# Altium PCB PCB.PcbDoc
Units mil, origin at the board's own origin, x right, y up, seen from the top; angles counter-clockwise.
Board outline 1000 x 1500 mil, 4 copper layers (Top Copper, Signal Layer GND, Signal Layer POWER, Bottom Copper), stack 61.811 mil thick; 54 components, 33 nets, 142 pads, 135 vias.
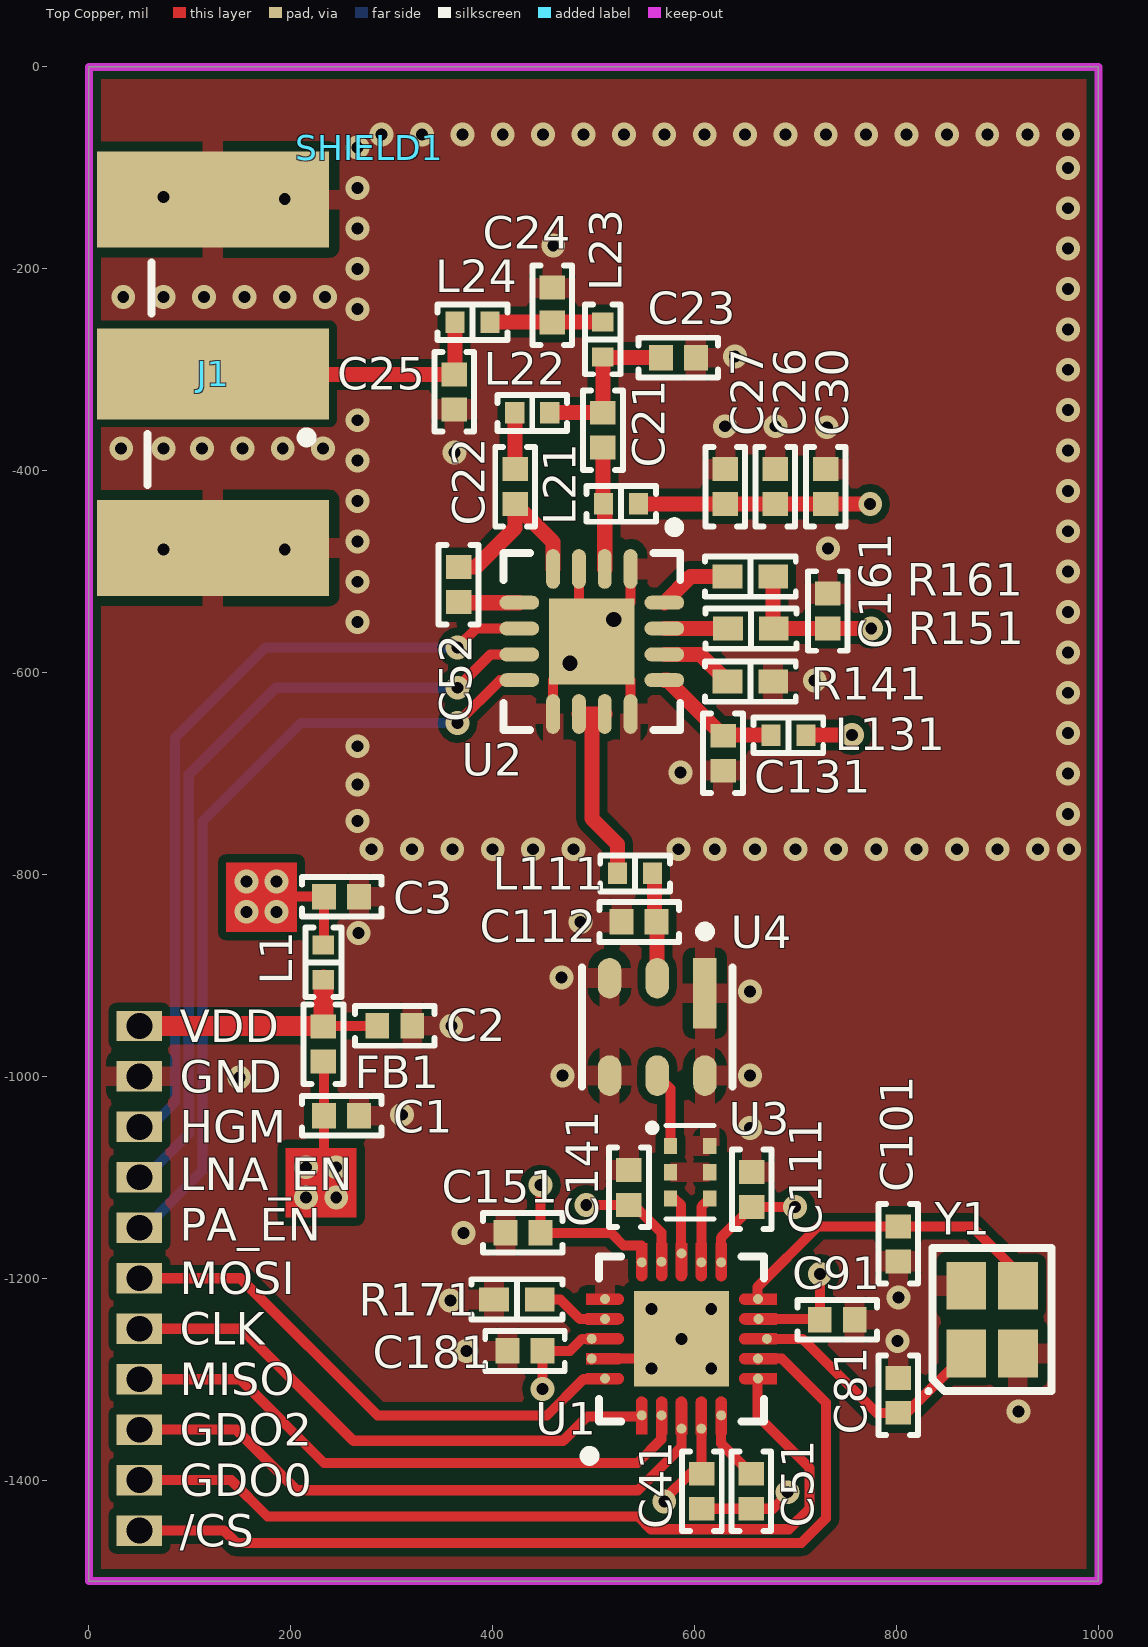
[diagram p0: Top Copper view]
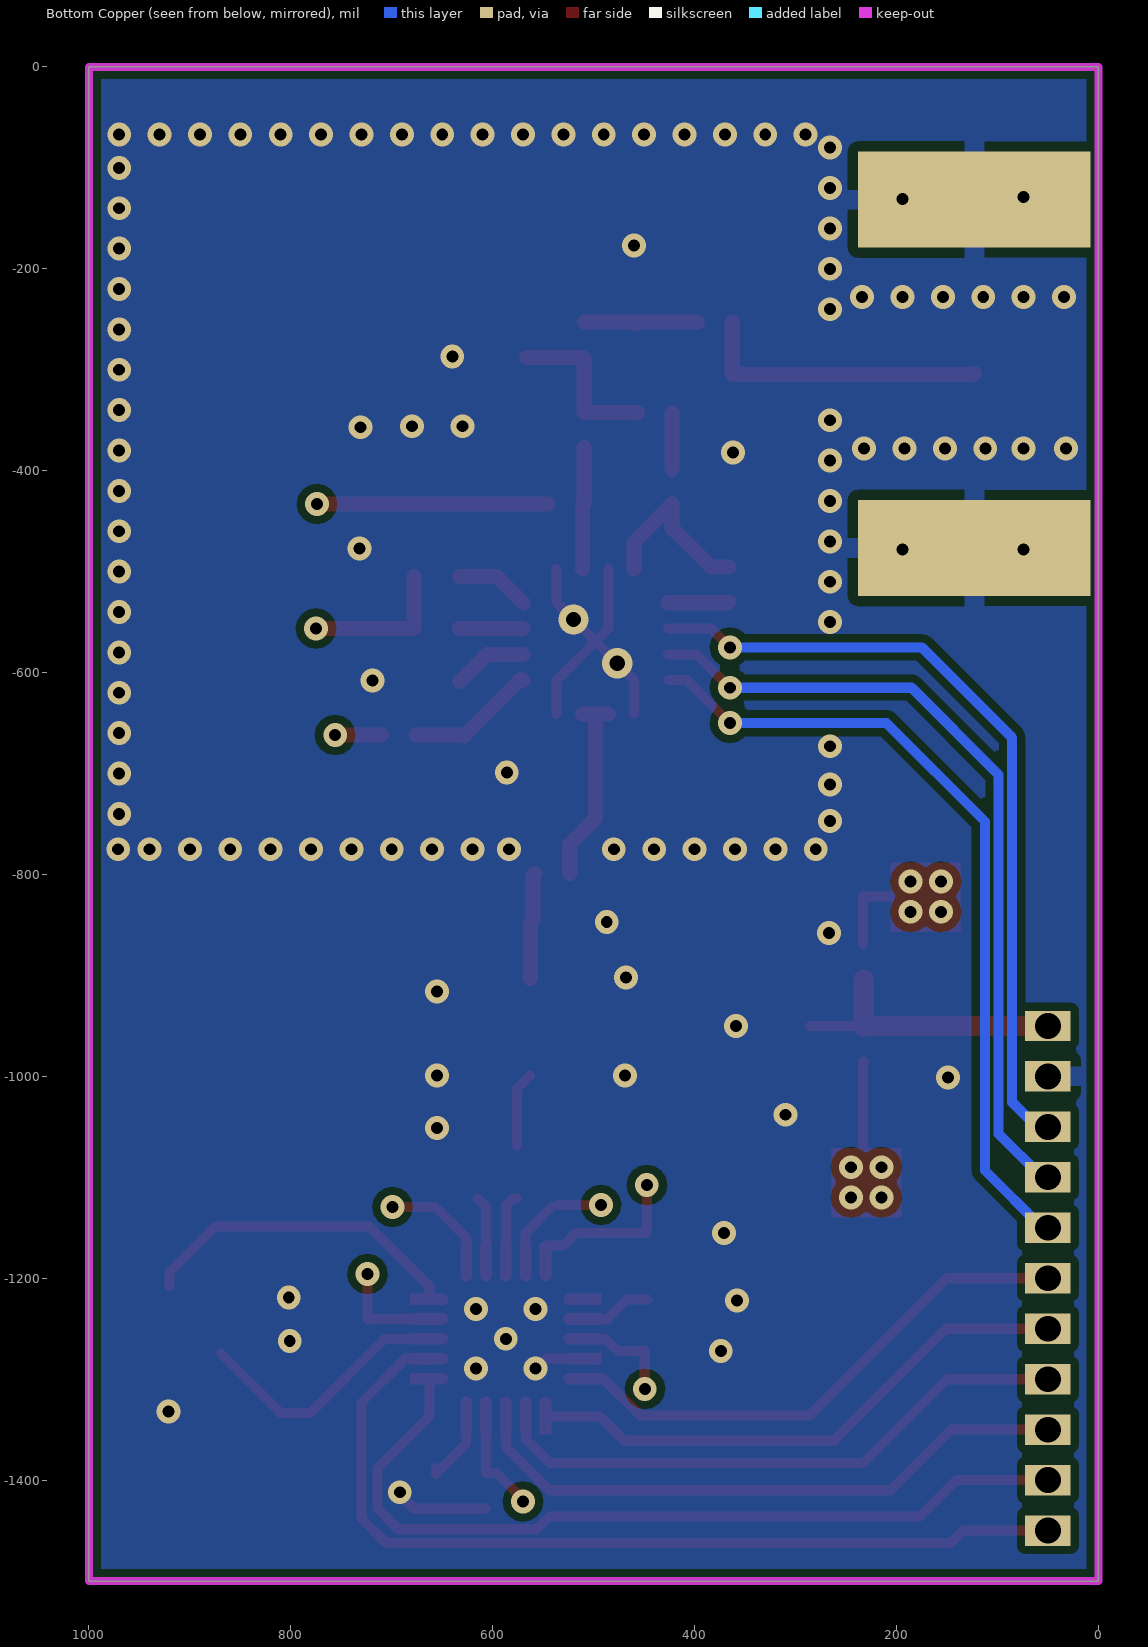
[diagram p1: Bottom Copper view, seen from below]
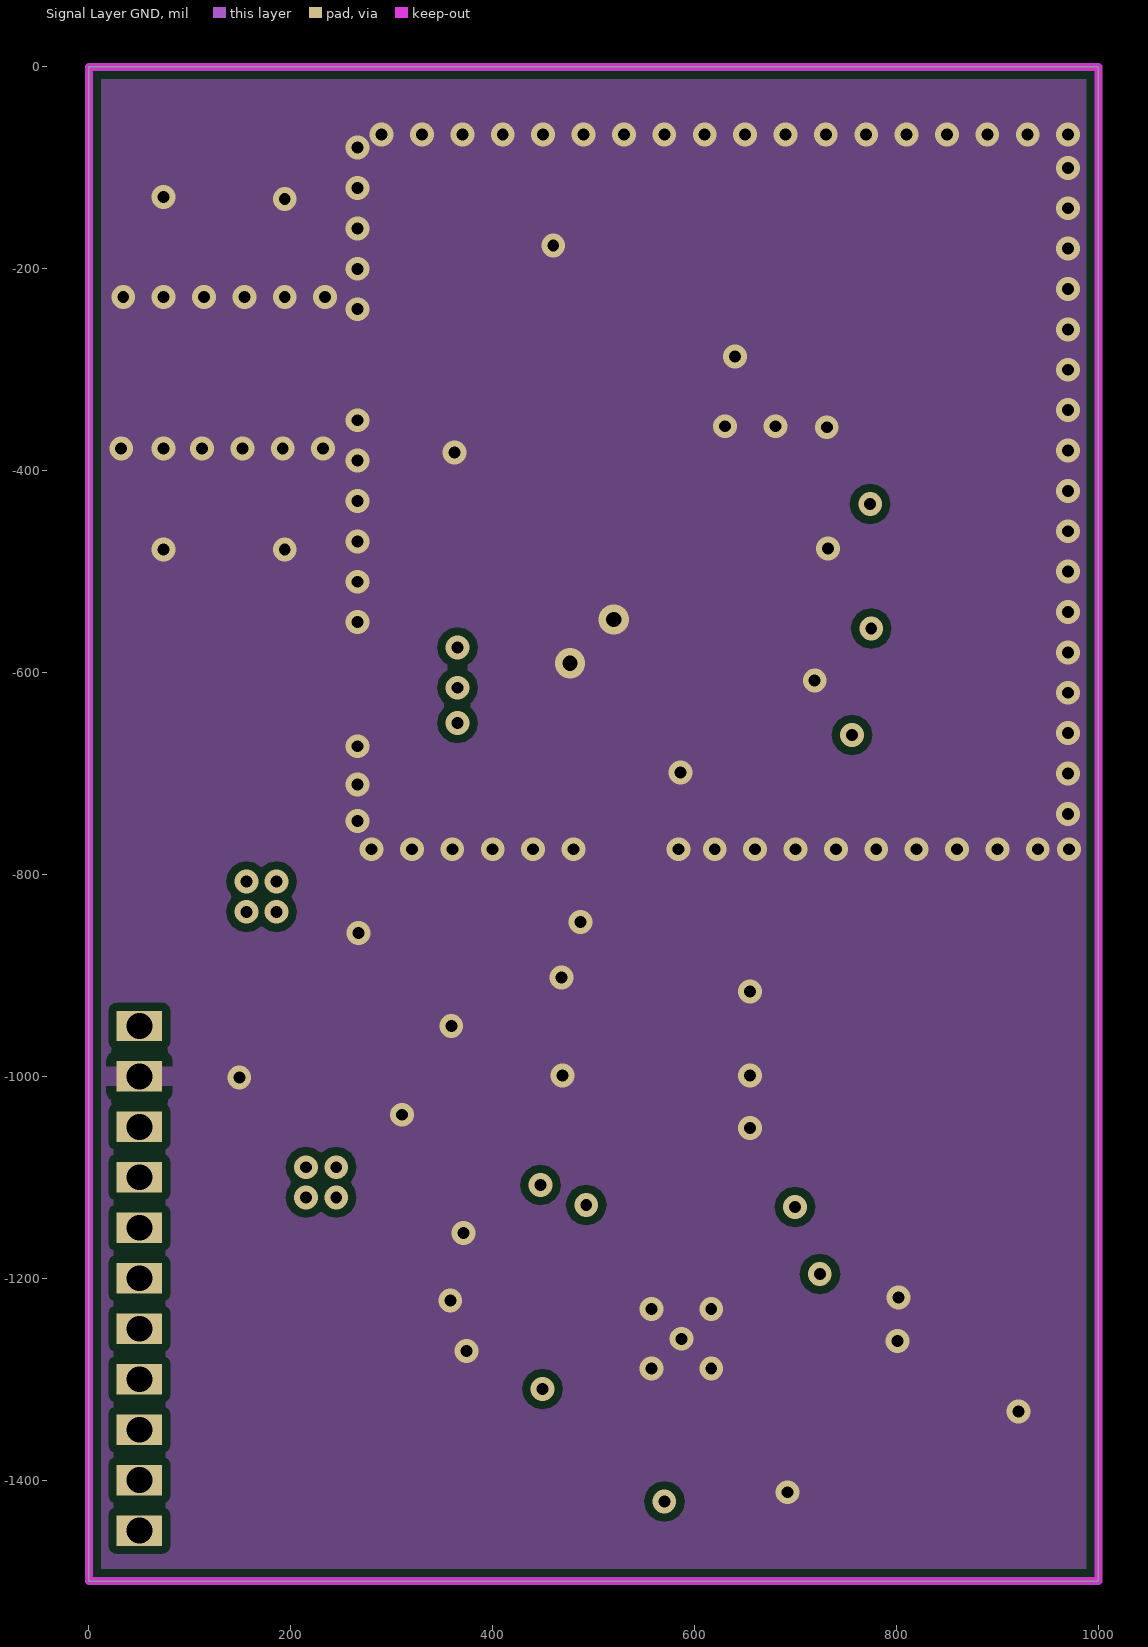
[diagram p2: Signal Layer GND]
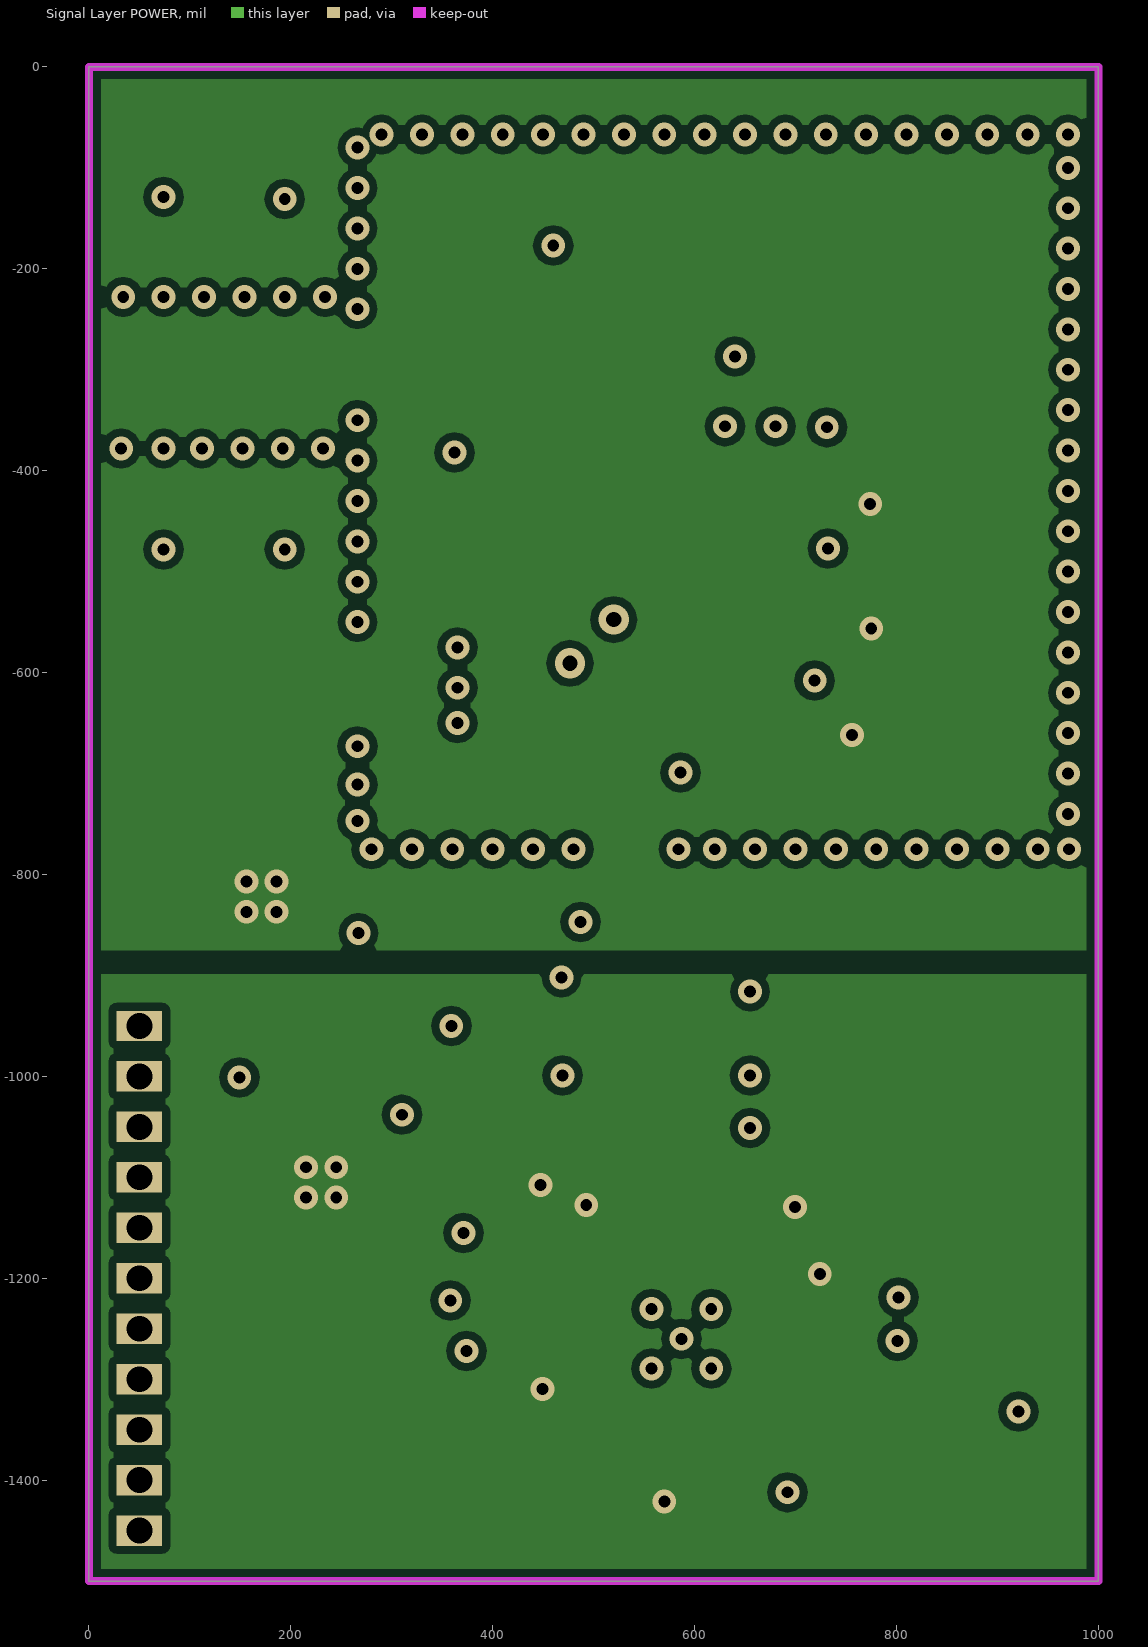
[diagram p3: Signal Layer POWER]

## Layer stack, top to bottom
Top Mask: solder mask 0.591, Solder Resist, Dk 3.8
Top Copper: signal copper 1.378
Dielectric 1: prepreg 7.874, 7628, Dk 4.6
Signal Layer GND: signal copper 0.689
Core: core 41.929, FR-4, Dk 4.5
Signal Layer POWER: signal copper 0.689
Dielectric 2: prepreg 7.874, 7628, Dk 4.6
Bottom Copper: signal copper 1.378
Bottom Mask: solder mask 0.591, Solder Resist, Dk 3.8

## Board outline
0,-1500 1000,-1500 1000,0 0,0

## Design rules (kind name [scope] priority, off if disabled: settings)
BoardOutlineClearance [All] p1: gap=7.87 ignorepadtopadclearanceinfootprint=FALSE except(15.75: Arc-SplitBarrior Arc-SplitContinuation Track-SplitBarrior Track-SplitContinuation SMDPad-SplitBarrior SMDPad-SplitContinuation THPad-SplitBarrior THPad-SplitContinuation Via-SplitBarrior Via-SplitContinuation Fill-SplitBarrior Fill-SplitContinuation Poly-SplitBarrior Poly-SplitContinuation Region-SplitBarrior Region-SplitContinuation Text-SplitBarrior Text-SplitContinuation)
Clearance "Clearance Bottom Layer" [OnLayer('Bottom Layer')] p1: gap=8 ignorepadtopadclearanceinfootprint=TRUE except(10: Arc-Text Track-Text SMDPad-Text THPad-Text Via-Text Fill-Text Poly-Text Region-Text Text-Text)
Clearance "Clearance Top Layer" [OnLayer('Top Layer')] p2: gap=8 ignorepadtopadclearanceinfootprint=TRUE except(10: Arc-Text Track-Text SMDPad-Text THPad-Text Via-Text Fill-Text Poly-Text Region-Text Text-Text)
Clearance [All] p3: gap=7.87 ignorepadtopadclearanceinfootprint=FALSE except(3.5: Arc-Arc Arc-Track Arc-SMDPad Track-Track Track-SMDPad SMDPad-SMDPad; 5: Arc-Via Track-Via SMDPad-Via THPad-Via Via-Via; 10: Arc-Text Track-Text SMDPad-Text THPad-Text Via-Text Fill-Text Poly-Text Region-Text Text-Text)
HoleSize [All] p1: absolutevalues=TRUE maxlimit=248.03 minlimit=7.87 maxpercent=80.000 minpercent=20.000
MinimumAnnularRing [All] p1: minimumring=3
MinimumSolderMaskSliver [All] p1: minsoldermaskwidth=3.94
PolygonConnect PolygonConnect_1 [All] p1: thpad.connectstyle=Relief thpad.reliefconductorwidth=20 thpad.reliefentries=4 thpad.polygonreliefangle="90 Angle" thpad.airgapwidth=10 smdpad.connectstyle=Relief smdpad.reliefconductorwidth=20 smdpad.reliefentries=4 smdpad.polygonreliefangle="90 Angle" smdpad.airgapwidth=10 via.connectstyle=Direct via.reliefconductorwidth=20 via.reliefentries=4 via.polygonreliefangle="90 Angle" via.airgapwidth=10
RoutingCorners [All] p1: cornerstyle=Round minsetback=100 maxsetback=100
RoutingVias [All] p1: holewidth=19.68 width=39.37 viastyle="Through Hole" minholewidth=7.87 minwidth=17.72 maxholewidth=39.37 maxwidth=78.74
SilkToSilkClearance [All] p1: silktosilkclearance=3.94
SilkToSolderMaskClearance [IsPad] p1: minsilkscreentomaskgap=3.94 clearancetoexposedcopper=TRUE
SolderMaskExpansion [All] p1: expansion=4
Width [All] p1: maxlimit=100 minlimit=3.5 preferedwidth=15
25 further rules are at their usual default settings.

## Classes and differential pairs
component class POWER_SUPPLY: C1 C2 C3 C26 C27 C30 C131 C161 FB1 L1 L21 L131
component class "RF MODULE": /CS C21 C22 C23 C24 C25 C41 C51 C52 C81 C91 C101 C111 C112 C141 C151 C181 CLK GDO0 GDO2 GND HGM J1 L22 L23 L24 L111 LNA_EN MISO MOSI PA_EN R141 R151 R161 R171 SHIELD1 U1 U2 U3 U4 VDD Y1

## Components (designator, comment, footprint, x,y, rotation, side; value= is the part's Value field where it differs from the comment)
/CS "Castellation" CASTELLATION 50,-1450 r270 top
C1 "1uF" "CAP 0402/1005" 250.32,-1039 r180 top
C2 "220pF" "CAP 0402/1005" 303,-950 r180 top
C3 "10uF" "CAP 0402/1005" 250.32,-822 r180 top
C21 "47pF" "CAP 0402/1005" 509.24,-359.85 r270 top
C22 "12pF" "CAP 0402/1005" 422.24,-415.79 r90 top
C23 "3.3pF" "CAP 0402/1005" 584,-288 r180 top
C24 "7.5pF" "CAP 0402/1005" 459,-236 r270 top
C25 "0.50pF" "CAP 0402/1005" 362,-322 r90 top
C26 "47pF" "CAP 0402/1005" 680,-415.72 r270 top
C27 "1000pF" "CAP 0402/1005" 630.43,-415.72 r270 top
C30 "1uF" "CAP 0402/1005" 730,-415.72 r270 top
C41 "0.10uF" "CAP 0402/1005" 607.24,-1411 r90 top
C51 "0.10uF" "CAP 0402/1005" 656.24,-1411 r90 top
C52 "12pF" "CAP 0402/1005" 366.2,-512.88 r90 top
C81 "12pF" "CAP 0402/1005" 801.69,-1315.97 r270 top
C91 "0.10uF" "CAP 0402/1005" 741.39,-1241 r180 top
C101 "15pF" "CAP 0402/1005" 801.69,-1166.03 r90 top
C111 "0.10uF" "CAP 0402/1005" 656.69,-1112 r270 top
C112 "0.80pF" "CAP 0402/1005" 545,-847 r0 top
C131 "15pF" "CAP 0402/1005" 628.2,-679.88 r90 top
C141 "0.10uF" "CAP 0402/1005" 535,-1110 r270 top
C151 "0.10uF" "CAP 0402/1005" 430,-1155 r0 top
C161 "27pF" "CAP 0402/1005" 732,-539 r270 top
C181 "0.10uF" "CAP 0402/1005" 432,-1272 r0 top
CLK "Castellation" CASTELLATION 50,-1250 r270 top
FB1 "1 kOhm @ 100MHz" "FER 0402/1005" 232.32,-968 r270 top
GDO0 "Castellation" CASTELLATION 50,-1400 r270 top
GDO2 "Castellation" CASTELLATION 50,-1350 r270 top
GND "Castellation" CASTELLATION 50,-1000 r270 top
HGM "Castellation" CASTELLATION 50,-1050 r270 top
J1 "73251-1150" Molex_73251-1150_0 -159.28,-304 r0 top
L1 "11nH" "IND 0402/1005 RF WW" 232.32,-887 r90 top
L21 "22nH" "IND 0402/1005 RF WW" 527.24,-432.85 r0 top
L22 "7.5nH" "IND 0402/1005 RF WW" 439.19,-342.78 r0 top
L23 "2.9nH" "IND 0402/1005 RF WW" 509,-270 r270 top
L24 "9.1nH" "IND 0402/1005 RF WW" 380,-253 r0 top
L111 "10nH" "IND 0402/1005 RF WW" 541,-799 r180 top
L131 "1.5nH" "IND 0402/1005 RF WW" 693,-662 r180 top
LNA_EN "Castellation" CASTELLATION 50,-1100 r270 top
MISO "Castellation" CASTELLATION 50,-1300 r270 top
MOSI "Castellation" CASTELLATION 50,-1200 r270 top
PA_EN "Castellation" CASTELLATION 50,-1150 r270 top
R141 "3.3k" "RES 0402/1005" 655.2,-608.88 r180 top
R151 "47" "RES 0402/1005" 655.74,-556.4 r180 top
R161 "10" "RES 0402/1005" 655.2,-504.88 r180 top
R171 "56k" "RES 0402/1005" 424,-1221 r0 top
SHIELD1 "SMS-202F" SMS-202F 278,-80 r0 top
U1 "CC1101RGPR" Texas_Instruments_RGP0020C_0 587,-1260 r0 top
U2 "CC1190RGVT" QFN65P400X400X100_HS-17N 498.2,-569.15 r270 top
U3 "0896BM15A0001" 0896BM15A0001 595,-1095 r0 top
U4 "Filter_TDK_B39871B3725U410_eec" TDK_B39871B3725U410_0 563,-951 r270 top
VDD "Castellation" CASTELLATION 50,-950 r270 top
Y1 "26MHz" "NDK NX2520SA" 894.69,-1241 r90 top

## Footprints (in the part's own frame and the unit in brackets; to place one, negate y for a bottom-side part, rotate by r counter-clockwise, add the part's x,y. Pads: shape width x height; smd on the part's side, far side on the other; paste and mask are expansions set on the pad)
0896BM15A0001 [mm]
  rect 0.33x0.41 smd: 1(-0.483,0.66) 2(-0.483,0) 3(-0.483,-0.66) 4(0.507,-0.66) 5(0.507,0) 6(0.507,0.66)
  silkscreen extent -0.97,-1.17 0.61,1.18, body extent -0.61,-1.25 0.64,1.25, height 0.8
"CAP 0402/1005" [mm] "Chip Capacitor, 2-Leads, Body 1.02x0.51mm, IPC Medium Density"
  rect 0.6x0.64 smd: 1(-0.44,0) 2(0.44,0)
  silkscreen extent -1,-0.5 1,0.5, body extent -0.5,-0.26 0.5,0.26, height 0.52
CASTELLATION [mil]
  rect 30x45 hole 25.59: PIN(0,0)
"FER 0402/1005" [mm] "Chip Ferrite, 2-Leads, Body 1.02x0.51mm, IPC Medium Density"
  rect 0.6x0.64 smd: 1(-0.44,0) 2(0.44,0)
  silkscreen extent -1,-0.5 1,0.5, body extent -0.5,-0.26 0.5,0.26, height 0.52
"IND 0402/1005 RF WW" [mm] "Chip Inductor, 2-Leads, Body 1.00x0.50mm, IPC High Density"
  rect 0.48x0.54 smd: 1(-0.44,0) 2(0.44,0)
  silkscreen extent -0.87,-0.45 0.87,0.45, body extent -0.5,-0.29 0.5,0.29, height 0.51
Molex_73251-1150_0 [mm]
  rect 5.84x2.29 smd paste+0 mask+0: 1(7.17,0)
  rect 5.84x2.415 smd paste+0 mask+0: 2(7.17,4.383) 3(7.17,-4.383)
  rect 5.84x2.415 smd far side paste+0 mask+0: 4(7.17,4.383) 5(7.17,-4.383)
  silkscreen extent 5.53,-2.8 9.65,2.8, body extent -4.5,-4.76 9.77,4.76, height 4.51
"NDK NX2520SA" [mm] "Crystal, 4-Leads, Body 2.00x2.50mm, Pitch 1.70mm, IPC Medium Density"
  rect 1.2x1 smd: 1(-0.85,0.65) 2(-0.85,-0.65) 3(0.85,-0.65) 4(0.85,0.65)
  silkscreen extent -1.85,-1.5 1.8,1.65, body extent -1.26,-1.01 1.26,1.01, height 0.5
QFN65P400X400X100_HS-17N [mm] "QFN, 16-Leads, Body 4.00x4.00mm, Pitch 0.65mm, Thermal Pad 2.16x2.16mm, IPC Medium Density"
  oval 1x0.35 smd: 1(-1.825,0.975) 2(-1.825,0.325) 3(-1.825,-0.325) 4(-1.825,-0.975) 9(1.825,-0.975) 10(1.825,-0.325) 11(1.825,0.325) 12(1.825,0.975)
  oval 0.35x1 smd: 5(-0.975,-1.825) 6(-0.325,-1.825) 7(0.325,-1.825) 8(0.975,-1.825) 13(0.975,1.825) 14(0.325,1.825) 15(-0.325,1.825) 16(-0.975,1.825)
  rect 2.16x2.16 smd: 17(0,0)
  silkscreen extent -3,-2.22 2.22,2.22, body extent -2.07,-2.07 2.07,2.07, height 1
"RES 0402/1005" [mm] "Chip Resistor, 2-Leads, Body 1.0x0.5mm, IPC Medium Density"
  rect 0.75x0.6 smd: 1(-0.575,0) 2(0.575,0)
  silkscreen extent -1.14,-0.51 1.14,0.51, body extent -0.5,-0.25 0.5,0.25, height 0.35
SMS-202F [mil] "RF SHIELD 0.65\" X 0.65\" SMD"
  body extent 22,-665 661,-26, height 142
TDK_B39871B3725U410_0 [mm]
  rect 1.771x0.591 smd paste+0 mask+0: 1(-0.85,1.2)
  oval 1.021x0.591 smd paste+0 mask+0: 2(-1.225,0) 3(-1.225,-1.2) 4(1.225,-1.2) 5(1.225,0) 6(1.225,1.2)
  silkscreen extent -2.52,-1.9 1.5,1.9, body extent -1.52,-1.5 1.52,1.5, height 1.26
Texas_Instruments_RGP0020C_0 [mm]
  round 0.252 smd paste-1000 mask+0: 1(-1,-1.925) 2(-0.5,-1.925) 3(0,-2.26) 4(0.5,-2.26) 5(1,-1.925) 6(1.925,-1) 7(1.925,-0.5) 8(2.15,0) 9(1.94,0.5) 10(1.925,1) 11(1,1.925) 12(0.5,1.925) 13(0,2.15) 14(-0.5,1.94) 15(-1,1.925) 16(-1.925,1) 17(-1.925,0.5) 18(-2.26,0) 19(-2.26,-0.5) 20(-1.925,-1)
  rect 2.4x2.4 smd paste-1000 mask+0: 21(0,0)
  Top Copper region: -2.4,-0.86 -1.59,-0.86 -1.536,-0.871 -1.491,-0.901 -1.461,-0.946 -1.45,-1 -1.45,-1 -1.461,-1.054 -1.491,-1.099 -1.536,-1.129 -1.59,-1.14 -1.59,-1.14 -2.4,-1.14
  Top Copper region: -2.4,-0.36 -1.59,-0.36 -1.536,-0.371 -1.491,-0.401 -1.461,-0.446 -1.45,-0.5 -1.45,-0.5 -1.461,-0.554 -1.491,-0.599 -1.536,-0.629 -1.59,-0.64 -1.59,-0.64 -2.4,-0.64
  Top Copper region: -2.4,0.14 -1.59,0.14 -1.536,0.129 -1.491,0.099 -1.461,0.054 -1.45,0 -1.45,0 -1.461,-0.054 -1.491,-0.099 -1.536,-0.129 -1.59,-0.14 -1.59,-0.14 -2.4,-0.14
  Top Copper region: -2.4,0.64 -1.59,0.64 -1.536,0.629 -1.491,0.599 -1.461,0.554 -1.45,0.5 -1.45,0.5 -1.461,0.446 -1.491,0.401 -1.536,0.371 -1.59,0.36 -1.59,0.36 -2.4,0.36
  Top Copper region: -2.4,1.14 -1.59,1.14 -1.536,1.129 -1.491,1.099 -1.461,1.054 -1.45,1 -1.45,1 -1.461,0.946 -1.491,0.901 -1.536,0.871 -1.59,0.86 -1.59,0.86 -2.4,0.86
  Top Copper region: 2.4,0.86 1.59,0.86 1.536,0.871 1.491,0.901 1.461,0.946 1.45,1 1.45,1 1.461,1.054 1.491,1.099 1.536,1.129 1.59,1.14 1.59,1.14 2.4,1.14
  Top Copper region: 2.4,0.36 1.59,0.36 1.536,0.371 1.491,0.401 1.461,0.446 1.45,0.5 1.45,0.5 1.461,0.554 1.491,0.599 1.536,0.629 1.59,0.64 1.59,0.64 2.4,0.64
  Top Copper region: 2.4,-0.14 1.59,-0.14 1.536,-0.129 1.491,-0.099 1.461,-0.054 1.45,0 1.45,0 1.461,0.054 1.491,0.099 1.536,0.129 1.59,0.14 1.59,0.14 2.4,0.14
  Top Copper region: 2.4,-0.64 1.59,-0.64 1.536,-0.629 1.491,-0.599 1.461,-0.554 1.45,-0.5 1.45,-0.5 1.461,-0.446 1.491,-0.401 1.536,-0.371 1.59,-0.36 1.59,-0.36 2.4,-0.36
  Top Copper region: 2.4,-1.14 1.59,-1.14 1.536,-1.129 1.491,-1.099 1.461,-1.054 1.45,-1 1.45,-1 1.461,-0.946 1.491,-0.901 1.536,-0.871 1.59,-0.86 1.59,-0.86 2.4,-0.86
  Top Copper region: -0.86,2.4 -0.86,1.59 -0.871,1.536 -0.901,1.491 -0.946,1.461 -1,1.45 -1,1.45 -1.054,1.461 -1.099,1.491 -1.129,1.536 -1.14,1.59 -1.14,1.59 -1.14,2.4
  Top Copper region: -0.36,2.4 -0.36,1.59 -0.371,1.536 -0.401,1.491 -0.446,1.461 -0.5,1.45 -0.5,1.45 -0.554,1.461 -0.599,1.491 -0.629,1.536 -0.64,1.59 -0.64,1.59 -0.64,2.4
  Top Copper region: 0.14,2.4 0.14,1.59 0.129,1.536 0.099,1.491 0.054,1.461 0,1.45 0,1.45 -0.054,1.461 -0.099,1.491 -0.129,1.536 -0.14,1.59 -0.14,1.59 -0.14,2.4
  Top Copper region: 0.64,2.4 0.64,1.59 0.629,1.536 0.599,1.491 0.554,1.461 0.5,1.45 0.5,1.45 0.446,1.461 0.401,1.491 0.371,1.536 0.36,1.59 0.36,1.59 0.36,2.4
  Top Copper region: 1.14,2.4 1.14,1.59 1.129,1.536 1.099,1.491 1.054,1.461 1,1.45 1,1.45 0.946,1.461 0.901,1.491 0.871,1.536 0.86,1.59 0.86,1.59 0.86,2.4
  Top Copper region: 0.86,-2.4 0.86,-1.59 0.871,-1.536 0.901,-1.491 0.946,-1.461 1,-1.45 1,-1.45 1.054,-1.461 1.099,-1.491 1.129,-1.536 1.14,-1.59 1.14,-1.59 1.14,-2.4
  Top Copper region: 0.36,-2.4 0.36,-1.59 0.371,-1.536 0.401,-1.491 0.446,-1.461 0.5,-1.45 0.5,-1.45 0.554,-1.461 0.599,-1.491 0.629,-1.536 0.64,-1.59 0.64,-1.59 0.64,-2.4
  Top Copper region: -0.14,-2.4 -0.14,-1.59 -0.129,-1.536 -0.099,-1.491 -0.054,-1.461 0,-1.45 0,-1.45 0.054,-1.461 0.099,-1.491 0.129,-1.536 0.14,-1.59 0.14,-1.59 0.14,-2.4
  Top Copper region: -0.64,-2.4 -0.64,-1.59 -0.629,-1.536 -0.599,-1.491 -0.554,-1.461 -0.5,-1.45 -0.5,-1.45 -0.446,-1.461 -0.401,-1.491 -0.371,-1.536 -0.36,-1.59 -0.36,-1.59 -0.36,-2.4
  Top Copper region: -1.14,-2.4 -1.14,-1.59 -1.129,-1.536 -1.099,-1.491 -1.054,-1.461 -1,-1.45 -1,-1.45 -0.946,-1.461 -0.901,-1.491 -0.871,-1.536 -0.86,-1.59 -0.86,-1.59 -0.86,-2.4
  silkscreen extent -2.44,-3.07 2.07,2.07, body extent -2.5,-2.5 2.5,2.5, height 0.8

## Part data
C1 C30: library part GRM155R60J105KE19D, "CAP CER 1UF 6.3V X5R 0402", Device Package="0402 (1005 Metric)", Manufacturer="Murata Electronics North America", Supplier Part Number 1=490-1320-2-ND, TemperatureCoefficient=X5R, TemperatureRange="-55C ~ 85C", Tolerance=10%, Voltage=6.3V, ComponentLink1Description=Datasheet, ComponentLink1URL=http://www.murata.com/~/media/webrenewal/support/library/catalog/products/capacitor/mlcc/c02e.pdf, ComponentLink2Description="Digi-Key Listing", ComponentLink2URL=https://www.digikey.com/product-detail/en/murata-electronics-north-america/GRM155R60J105KE19D/490-1320-2-ND/587208, PartId=12330, Part Number=GRM155R60J105KE19D, Price=0,006, Supplier 1=Digi-Key
C2: library part GCM1555C1H221JA16D, "CAP CER 220PF 50V NP0 0402", Device Package="0402 (1005 Metric)", Manufacturer="Murata Electronics North America", Supplier Part Number 1=490-4927-2-ND, TemperatureCoefficient="C0G, NP0", TemperatureRange="-55C ~ 125C", Tolerance=5%, Voltage=50V, ComponentLink1Description=Datasheet, ComponentLink1URL=http://www.murata.com/~/media/webrenewal/support/library/catalog/products/capacitor/mlcc/c03e.ashx, ComponentLink2Description="Digi-Key Listing", ComponentLink2URL=https://www.digikey.com/product-detail/en/murata-electronics-north-america/GCM1555C1H221JA16D/490-4927-2-ND/1765175, PartId=12828, Part Number=GCM1555C1H221JA16D, Price=0,0109, Supplier 1=Digi-Key
C3: library part C1005X5R0J106M050BC, "CAP CER 10UF 6.3V X5R 0402", Device Package="0402 (1005 Metric)", Manufacturer="TDK Corporation", Supplier Part Number 1=445-8920-2-ND, TemperatureCoefficient=X5R, TemperatureRange="-55C ~ 85C", Tolerance=20%, Voltage=6.3V, ComponentLink1Description=Datasheet, ComponentLink1URL=https://product.tdk.com/info/en/catalog/datasheets/mlcc_commercial_general_en.pdf, ComponentLink2Description="Digi-Key Listing", ComponentLink2URL=https://www.digikey.com/product-detail/en/tdk-corporation/C1005X5R0J106M050BC/445-8920-2-ND/3507809, PartId=12380, Part Number=C1005X5R0J106M050BC, Price=0,119, Supplier 1=Digi-Key
C21 C26: library part GRM1555C1H470JA01D, "CAP CER 47PF 50V NP0 0402", Device Package="0402 (1005 Metric)", Manufacturer="Murata Electronics North America", Supplier Part Number 1=490-5942-2-ND, TemperatureCoefficient="C0G, NP0", TemperatureRange="-55C ~ 125C", Tolerance=5%, Voltage=50V, ComponentLink1Description=Datasheet, ComponentLink1URL=http://www.murata.com/~/media/webrenewal/support/library/catalog/products/capacitor/mlcc/c02e.ashx, ComponentLink2Description="Digi-Key listing", ComponentLink2URL=http://digikey.com/product-detail/en/GRM1555C1H470JA01D/490-5942-2-ND/3693853, PartId=4827, Part Number=GRM1555C1H470JA01D, Price=0,0033, Supplier 1=Digi-Key, Type=-
C22 C81: library part GRM1555C1H120JA01D, "CAP CER 12PF 50V NP0 0402", Device Package="0402 (1005 Metric)", Manufacturer="Murata Electronics North America", Supplier Part Number 1=490-5924-2-ND, TemperatureCoefficient="C0G, NP0", TemperatureRange="-55C ~ 125C", Tolerance=5%, Voltage=50V, ComponentLink1Description=Datasheet, ComponentLink1URL=http://www.murata.com/~/media/webrenewal/support/library/catalog/products/capacitor/mlcc/c02e.ashx, ComponentLink2Description="Digi-Key listing", ComponentLink2URL=http://digikey.com/product-detail/en/GRM1555C1H120JA01D/490-5924-2-ND/3693831, PartId=4835, Part Number=GRM1555C1H120JA01D, Price=0,0042, Supplier 1=Digi-Key, Type=-
C23: library part GRM1555C1H3R3CA01D, "CAP CER 3.3PF 50V NP0 0402", Device Package="0402 (1005 Metric)", Manufacturer="Murata Electronics North America", Supplier Part Number 1=490-5938-2-ND, TemperatureCoefficient="C0G, NP0", TemperatureRange="-55C ~ 125C", Tolerance=0.25pF, Voltage=50V, ComponentLink1Description=Datasheet, ComponentLink1URL=http://www.murata.com/~/media/webrenewal/support/library/catalog/products/capacitor/mlcc/c02e.ashx, ComponentLink2Description="Digi-Key listing", ComponentLink2URL=http://digikey.com/product-detail/en/GRM1555C1H3R3CA01D/490-5938-2-ND/3693848, PartId=4911, Part Number=GRM1555C1H3R3CA01D, Price=0,0069, Supplier 1=Digi-Key, Type=-
C24: library part GRM1555C1H7R5CA01D, "CAP CER 7.5PF 50V NP0 0402", Device Package="0402 (1005 Metric)", Manufacturer="Murata Electronics North America", Supplier Part Number 1=490-7219-2-ND, TemperatureCoefficient="C0G, NP0", TemperatureRange="-55C ~ 125C", Tolerance=0.25pF, Voltage=50V, ComponentLink1Description=Datasheet, ComponentLink1URL=http://www.murata.com/~/media/webrenewal/support/library/catalog/products/capacitor/mlcc/c02e.ashx, ComponentLink2Description="Digi-Key listing", ComponentLink2URL=http://digikey.com/product-detail/en/GRM1555C1H7R5CA01D/490-7219-2-ND/3693883, PartId=4924, Part Number=GRM1555C1H7R5CA01D, Price=0,0069, Supplier 1=Digi-Key, Type=-
C25: library part GRM1555C1HR50BA01D, "CAP CER 0.50PF 50V NP0 0402", Device Package="0402 (1005 Metric)", Manufacturer="Murata Electronics North America", Supplier Part Number 1=490-6263-2-ND, TemperatureCoefficient="C0G, NP0", TemperatureRange="-55C ~ 125C", Tolerance=0.1pF, Voltage=50V, ComponentLink1Description=Datasheet, ComponentLink1URL=http://www.murata.com/~/media/webrenewal/support/library/catalog/products/capacitor/mlcc/c02e.ashx, ComponentLink2Description="Digi-Key listing", ComponentLink2URL=http://digikey.com/product-detail/en/GRM1555C1HR50BA01D/490-6263-2-ND/3694055, PartId=5016, Part Number=GRM1555C1HR50BA01D, Price=0,0108, Supplier 1=Digi-Key, Type=-
C27: library part GRM1555C1H102JA01D, "CAP CER 1000PF 50V NP0 0402", Device Package="0402 (1005 Metric)", Manufacturer="Murata Electronics North America", Supplier Part Number 1=490-3244-2-ND, TemperatureCoefficient="C0G, NP0", TemperatureRange="-55C ~ 125C", Tolerance=5%, Voltage=50V, ComponentLink1Description=Datasheet, ComponentLink1URL=http://www.murata.com/~/media/webrenewal/support/library/catalog/products/capacitor/mlcc/c02e.ashx, ComponentLink2Description="Digi-Key listing", ComponentLink2URL=http://digikey.com/product-detail/en/GRM1555C1H102JA01D/490-3244-2-ND/702509, PartId=5126, Part Number=GRM1555C1H102JA01D, Price=0,0164, Supplier 1=Digi-Key, Type=-
C41 C51 C91 C111 C141 C151 C181: library part GRM152R61A104KE19D, "CAP CER 0.1UF 10V X5R 0402", Device Package="0402 (1005 Metric)", Manufacturer="Murata Electronics North America", Supplier Part Number 1=490-10008-2-ND, TemperatureCoefficient=X5R, TemperatureRange="-55C ~ 85C", Tolerance=10%, Voltage=10V, ComponentLink1Description=Datasheet, ComponentLink1URL=http://www.murata.com/~/media/webrenewal/support/library/catalog/products/capacitor/mlcc/c02e.pdf, ComponentLink2Description="Digi-Key Listing", ComponentLink2URL=https://www.digikey.com/product-detail/en/murata-electronics-north-america/GRM152R61A104KE19D/490-10008-2-ND/4904813, PartId=12630, Part Number=GRM152R61A104KE19D, Price=0,0207, Supplier 1=Digi-Key
C52: library part GRM1555C1H120FA01D, "CAP CER 12PF 50V NP0 0402", Device Package="0402 (1005 Metric)", Manufacturer="Murata Electronics North America", Supplier Part Number 1=490-6196-2-ND, TemperatureCoefficient="C0G, NP0", TemperatureRange="-55C ~ 125C", Tolerance=1%, Voltage=50V, ComponentLink1Description=Datasheet, ComponentLink1URL=http://www.murata.com/~/media/webrenewal/support/library/catalog/products/capacitor/mlcc/c02e.ashx, ComponentLink2Description="Digi-Key listing", ComponentLink2URL=http://digikey.com/product-detail/en/GRM1555C1H120FA01D/490-6196-2-ND/3693922, PartId=5082, Part Number=GRM1555C1H120FA01D, Price=0,0133, Supplier 1=Digi-Key, Type=-
C101 C131: library part GRM1555C1H150JA01D, "CAP CER 15PF 50V NP0 0402", Device Package="0402 (1005 Metric)", Manufacturer="Murata Electronics North America", Supplier Part Number 1=490-5888-2-ND, TemperatureCoefficient="C0G, NP0", TemperatureRange="-55C ~ 125C", Tolerance=5%, Voltage=50V, ComponentLink1Description=Datasheet, ComponentLink1URL=http://www.murata.com/~/media/webrenewal/support/library/catalog/products/capacitor/mlcc/c02e.ashx, ComponentLink2Description="Digi-Key listing", ComponentLink2URL=http://digikey.com/product-detail/en/GRM1555C1H150JA01D/490-5888-2-ND/2791374, PartId=4811, Part Number=GRM1555C1H150JA01D, Price=0,0032, Supplier 1=Digi-Key, Type=-
C112: library part GRM1555C1HR80BA01D, "CAP CER 0.80PF 50V NP0 0402", Device Package="0402 (1005 Metric)", Manufacturer="Murata Electronics North America", Supplier Part Number 1=490-6269-2-ND, TemperatureCoefficient="C0G, NP0", TemperatureRange="-55C ~ 125C", Tolerance=0.1pF, Voltage=50V, ComponentLink1Description=Datasheet, ComponentLink1URL=http://www.murata.com/~/media/webrenewal/support/library/catalog/products/capacitor/mlcc/c02e.ashx, ComponentLink2Description="Digi-Key listing", ComponentLink2URL=http://digikey.com/product-detail/en/GRM1555C1HR80BA01D/490-6269-2-ND/3694062, PartId=5139, Part Number=GRM1555C1HR80BA01D, Price=0,0178, Supplier 1=Digi-Key, Type=-
C161: library part GRM1555C1H270JA01D, "CAP CER 27PF 50V NP0 0402", Device Package="0402 (1005 Metric)", Manufacturer="Murata Electronics North America", Supplier Part Number 1=490-5869-2-ND, TemperatureCoefficient="C0G, NP0", TemperatureRange="-55C ~ 125C", Tolerance=5%, Voltage=50V, ComponentLink1Description=Datasheet, ComponentLink1URL=http://www.murata.com/~/media/webrenewal/support/library/catalog/products/capacitor/mlcc/c02e.ashx, ComponentLink2Description="Digi-Key listing", ComponentLink2URL=http://digikey.com/product-detail/en/GRM1555C1H270JA01D/490-5869-2-ND/3175188, PartId=4852, Part Number=GRM1555C1H270JA01D, Price=0,0053, Supplier 1=Digi-Key, Type=-
FB1: library part BLM15HD102SN1D, "FERRITE CHIP 1000 OHM 250MA 0402", Current Rating=250mA, DC Resistance="1.25 Ohm Max", Device Package="0402 (1005 Metric)", Manufacturer="Murata Electronics North America", Supplier Part Number 1=490-4003-2-ND, ComponentLink1Description=Datasheet, ComponentLink1URL=http://search.murata.co.jp/Ceramy/image/img/PDF/ENG/L0110S0101BLM15H.pdf, ComponentLink2Description="Digi-Key listing", ComponentLink2URL=http://digikey.com/product-detail/en/BLM15HD102SN1D/490-4003-2-ND/1016162, PartId=6552, Part Number=BLM15HD102SN1D, Price=0,073, Supplier 1=Digi-Key, Type="Differential Mode - Single"
J1: "SMA socket"
L1: library part LQW15AN11NJ00D, "FIXED IND 11NH 500MA 140 MOHM", DC Resistance="140 mOhm Max", Device Package="0402 (1005 Metric)", Manufacturer="Murata Electronics North America", Q at Frequency="30 @ 250MHz", Supplier Part Number 1=490-6766-2-ND, TemperatureRange="-55C ~ 125C", Tolerance=5%, ComponentLink1Description=Datasheet, ComponentLink1URL=http://search.murata.co.jp/Ceramy/image/img/PDF/ENG/L0075S0080LQW15A_00.pdf, ComponentLink2Description="Digi-Key listing", ComponentLink2URL=http://digikey.com/product-detail/en/LQW15AN11NJ00D/490-6766-2-ND/2594850, PartId=6366, Part Number=LQW15AN11NJ00D, Price=0,0733, Shielding=Unshielded, Supplier 1=Digi-Key, Type=Wirewound
L21: library part LQW15AN22NH00D, "FIXED IND 22NH 310MA 300 MOHM", DC Resistance="300 mOhm Max", Device Package="0402 (1005 Metric)", Manufacturer="Murata Electronics North America", Q at Frequency="25 @ 250MHz", Supplier Part Number 1=490-6788-2-ND, TemperatureRange="-55C ~ 125C", Tolerance=3%, ComponentLink1Description=Datasheet, ComponentLink1URL=http://search.murata.co.jp/Ceramy/image/img/PDF/ENG/L0075S0080LQW15A_00.pdf, ComponentLink2Description="Digi-Key listing", ComponentLink2URL=http://digikey.com/product-detail/en/LQW15AN22NH00D/490-6788-2-ND/2594873, PartId=6378, Part Number=LQW15AN22NH00D, Price=0,077, Shielding=Unshielded, Supplier 1=Digi-Key, Type=Wirewound
L22: library part LQW15AN7N5G00D, "FIXED IND 7.5NH 570MA 130 MOHM", DC Resistance="130 mOhm Max", Device Package="0402 (1005 Metric)", Manufacturer="Murata Electronics North America", Q at Frequency="25 @ 250MHz", Supplier Part Number 1=490-6846-2-ND, TemperatureRange="-55C ~ 125C", Tolerance=2%, ComponentLink1Description=Datasheet, ComponentLink1URL=http://search.murata.co.jp/Ceramy/image/img/PDF/ENG/L0075S0080LQW15A_00.pdf, ComponentLink2Description="Digi-Key listing", ComponentLink2URL=http://digikey.com/product-detail/en/LQW15AN7N5G00D/490-6846-2-ND/2594958, PartId=6416, Part Number=LQW15AN7N5G00D, Price=0,0807, Shielding=Unshielded, Supplier 1=Digi-Key, Type=Wirewound
L23: library part LQW15AN2N9B00D, "FIXED IND 2.9NH 750MA 70 MOHM", DC Resistance="70 mOhm Max", Device Package="0402 (1005 Metric)", Manufacturer="Murata Electronics North America", Q at Frequency="20 @ 250MHz", Supplier Part Number 1=490-6801-2-ND, TemperatureRange="-55C ~ 125C", Tolerance=0.1nH, ComponentLink1Description=Datasheet, ComponentLink1URL=http://search.murata.co.jp/Ceramy/image/img/PDF/ENG/L0075S0080LQW15A_00.pdf, ComponentLink2Description="Digi-Key listing", ComponentLink2URL=http://digikey.com/product-detail/en/LQW15AN2N9B00D/490-6801-2-ND/2594891, PartId=6410, Part Number=LQW15AN2N9B00D, Price=0,0807, Shielding=Unshielded, Supplier 1=Digi-Key, Type=Wirewound
L24: library part LQW15AN9N1G00D, "FIXED IND 9.1NH 540MA 140 MOHM", DC Resistance="140 mOhm Max", Device Package="0402 (1005 Metric)", Manufacturer="Murata Electronics North America", Q at Frequency="25 @ 250MHz", Supplier Part Number 1=490-6854-2-ND, TemperatureRange="-55C ~ 125C", Tolerance=2%, ComponentLink1Description=Datasheet, ComponentLink1URL=http://search.murata.co.jp/Ceramy/image/img/PDF/ENG/L0075S0080LQW15A_00.pdf, ComponentLink2Description="Digi-Key listing", ComponentLink2URL=http://digikey.com/product-detail/en/LQW15AN9N1G00D/490-6854-2-ND/2594968, PartId=6429, Part Number=LQW15AN9N1G00D, Price=0,0807, Shielding=Unshielded, Supplier 1=Digi-Key, Type=Wirewound
L111: library part LQW15AN10NG00D, "FIXED IND 10NH 500MA 170 MOHM", DC Resistance="170 mOhm Max", Device Package="0402 (1005 Metric)", Manufacturer="Murata Electronics North America", Q at Frequency="25 @ 250MHz", Supplier Part Number 1=490-6762-2-ND, TemperatureRange="-55C ~ 125C", Tolerance=2%, ComponentLink1Description=Datasheet, ComponentLink1URL=http://search.murata.co.jp/Ceramy/image/img/PDF/ENG/L0075S0080LQW15A_00.pdf, ComponentLink2Description="Digi-Key listing", ComponentLink2URL=http://digikey.com/product-detail/en/LQW15AN10NG00D/490-6762-2-ND/2594843, PartId=6397, Part Number=LQW15AN10NG00D, Price=0,0807, Shielding=Unshielded, Supplier 1=Digi-Key, Type=Wirewound
L131: library part LQW15AN1N5D00D, "FIXED IND 1.5NH 1A 30 MOHM 0402", DC Resistance="30 mOhm Max", Device Package="0402 (1005 Metric)", Manufacturer="Murata Electronics North America", Q at Frequency="10 @ 250MHz", Supplier Part Number 1=490-1136-2-ND, TemperatureRange="-55C ~ 125C", Tolerance=0.5nH, ComponentLink1Description=Datasheet, ComponentLink1URL=http://search.murata.co.jp/Ceramy/image/img/PDF/ENG/L0075S0080LQW15A_00.pdf, ComponentLink2Description="Digi-Key listing", ComponentLink2URL=http://digikey.com/product-detail/en/LQW15AN1N5D00D/490-1136-2-ND/584345, PartId=6359, Part Number=LQW15AN1N5D00D, Price=0,0689, Shielding=Unshielded, Supplier 1=Digi-Key, Type=Wirewound
R141: library part ERJ-2RKF3301X, "RES SMD 3.3K OHM 1% 1/10W 0402", Device Package="0402 (1005 Metric)", Manufacturer="Panasonic Electronic Components", PowerRating="0.1W, 1/10W", Supplier Part Number 1=P3.30KLTR-ND, TemperatureCoefficient=100ppm/C, TemperatureRange="-55C ~ 155C", Tolerance=1%, ComponentLink1Description=Datasheet, ComponentLink1URL=http://industrial.panasonic.com/www-cgi/jvcr13pz.cgi?E+PZ+3+AOA0002+ERJ2RKF3301X+7+WW, ComponentLink2Description="Digikey listing", ComponentLink2URL=http://digikey.com/product-detail/en/ERJ-2RKF3301X/P3.30KLTR-ND/1746191, PartId=159, Part Number=ERJ-2RKF3301X, Price=0,0043, Supplier 1=Digi-Key, Type="Thick Film"
R151: library part ERJ-2RKF47R0X, "RES SMD 47 OHM 1% 1/10W 0402", Device Package="0402 (1005 Metric)", Manufacturer="Panasonic Electronic Components", PowerRating="0.1W, 1/10W", Supplier Part Number 1=P47.0LTR-ND, TemperatureCoefficient=100ppm/C, TemperatureRange="-55C ~ 155C", Tolerance=1%, ComponentLink1Description=Datasheet, ComponentLink1URL=http://industrial.panasonic.com/www-cgi/jvcr13pz.cgi?E+PZ+3+AOA0002+ERJ2RKF47R0X+7+WW, ComponentLink2Description="Digikey listing", ComponentLink2URL=http://digikey.com/product-detail/en/ERJ-2RKF47R0X/P47.0LTR-ND/1746238, PartId=181, Part Number=ERJ-2RKF47R0X, Price=0,0043, Supplier 1=Digi-Key, Type="Thick Film"
R161: library part ERJ-2RKF10R0X, "RES SMD 10 OHM 1% 1/10W 0402", Device Package="0402 (1005 Metric)", Manufacturer="Panasonic Electronic Components", PowerRating="0.1W, 1/10W", Supplier Part Number 1=P10.0LTR-ND, TemperatureCoefficient=100ppm/C, TemperatureRange="-55C ~ 155C", Tolerance=1%, ComponentLink1Description=Datasheet, ComponentLink1URL=http://industrial.panasonic.com/www-cgi/jvcr13pz.cgi?E+PZ+3+AOA0002+ERJ2RKF10R0X+7+WW, ComponentLink2Description="Digikey listing", ComponentLink2URL=http://digikey.com/product-detail/en/ERJ-2RKF10R0X/P10.0LTR-ND/192072, PartId=14, Part Number=ERJ-2RKF10R0X, Price=0,0043, Supplier 1=Digi-Key, Type="Thick Film"
R171: library part ERJ-2RKF5602X, "RES SMD 56K OHM 1% 1/10W 0402", Device Package="0402 (1005 Metric)", Manufacturer="Panasonic Electronic Components", PowerRating="0.1W, 1/10W", Supplier Part Number 1=P56.0KLTR-ND, TemperatureCoefficient=100ppm/C, TemperatureRange="-55C ~ 155C", Tolerance=1%, ComponentLink1Description=Datasheet, ComponentLink1URL=http://industrial.panasonic.com/www-cgi/jvcr13pz.cgi?E+PZ+3+AOA0002+ERJ2RKF5602X+7+WW, ComponentLink2Description="Digikey listing", ComponentLink2URL=http://digikey.com/product-detail/en/ERJ-2RKF5602X/P56.0KLTR-ND/1016642, PartId=182, Part Number=ERJ-2RKF5602X, Price=0,0043, Supplier 1=Digi-Key, Type="Thick Film"
SHIELD1: "RF Shield Frame 0.650\" (16.51mm) X 0.650\" (16.51mm) Surface Mount", Package=None, Availability=Unavailable, MF=Laird, MP=SMS-202F, Price=None
U1: "Low-Power Sub-1GHz RF Transceiver 20-QFN -40 to 85"
U2: "LNA/PA RF Front End 6.2dB 11.6dB/27.9dB 16-Pin VQFN EP T/R", Frequency="850 MHz", Standby Current="50.0 nA", Supply Current="302 mA", Supply Voltage (DC)="2.00 V (min)", Antenna Connection="Single Ended", Clock Speed="851 GHz", Gain="11.6 dB", Lead-Free Status="Lead Free", Lifecycle Status=Active, Manufacturer Part Number=CC1190RGVT, Mounting Style="Surface Mount", Number of Pins=16, OctopartID=7662bfab5b7fa9a5, Octopart URL=http://octopart.com/cc1190rgvt-texas+instruments-12781691, Packaging="Cut Tape (CT)", REACH SVHC Compliance="No SVHC", RoHS=Compliant
U3: "868/915 MHz Impedance Matched/Balun/LPF Integrated Component", Part Number=0896BM15A0001
U4: "FILTER SAW 869.0MHZ SMD", Digikey Part Number=495-7095-1-ND, Frequency - Center=869MHz, Manufacturer=TDK, Mouser Part Number=871-B39871B3725U410, Package=SMD_FILTER_3MM0, Part Number=B39871B3725U410, Temperature="-45°C to +125°C", Temperature Range High=+125°C, Temperature Range Low=-45°C, Bandwidth=2MHz, ComponentLink1Description=Upverter, ComponentLink1URL=https://upverter.com/upn/revision/07501646d9ed6846/, ComponentLink2Description=Datasheet, ComponentLink2URL=https://en.rf360jv.com/inf/40/ds/ae/B3725.pdf, Digikey Description="FILTER SAW 869.0MHZ SMD", helpURL=https://upverter.com/upn/revision/07501646d9ed6846/, Insertion Loss=2.5dB, Lead Free=yes, RoHS=TRUE, Supplier 1=Digi-Key, Supplier 2=Mouser, Supplier Part Number 1=495-7095-1-ND, Supplier Part Number 2=871-B39871B3725U410
Y1: library part NX2520SA-26.000000MHZ, "CRYSTAL 26.0000MHZ 10PF SMD", Device Package="4-SMD, No Lead (DFN, LCC)", Frequency Stability=10ppm, Load Capacitance=10pF, Manufacturer=NDK, Operating Mode=Fundamental, Supplier Part Number 1=644-1063-2-ND, ComponentLink1Description=Datasheet, ComponentLink1URL=http://media.digikey.com/pdf/Data%20Sheets/NDK%20PDFs/NX2520SA.pdf, ComponentLink2Description="Digi-Key Listing", ComponentLink2URL=http://www.digikey.com/product-detail/en/NX2520SA-26.000000MHZ/644-1063-2-ND/1128845, ESR="70 Ohm", Frequency=26MHz, Frequency Tolerance=10ppm, PartId=8497, Part Number=NX2520SA-26.000000MHZ, Price=0,7336, Supplier 1=Digi-Key, Type="MHz Crystal"
/CS CLK GDO0 GDO2 GND HGM LNA_EN MISO MOSI PA_EN VDD: CustomComponentID=5jvg54js08ca3bt85oae

## Via types
v1: diameter 23.62, hole 11.81, Top Copper to Bottom Copper, tented both sides, 125 vias
v2: diameter 23.62, hole 11.81, Top Copper to Bottom Copper, 8 vias
v3: diameter 30, hole 15, Top Copper to Bottom Copper, 2 vias

## Nets (pads, with @x,y where several pads share a name; then routed paths per layer and width w, separated by ;. In a path a pad name is that pad's centre, name@x,y a point inside that pad or via, vN(x,y) a via of type N, cw(c..) or ccw(c..) an arc to the next point about the centre after c; other vN are vias at no path point)
C\S\: /CS.PIN U1.7 | length 895.5
  Top Copper w10: /CS.PIN 134,-1450 146.13,-1462.13 705.87,-1462.13 730,-1438 730,-1323 686.68,-1279.68 U1.7 ; U1.7@662.48,-1280.68 U1.7@662.79,-1280.68
CLK: CLK.PIN U1.1 | length 553.3
  Top Copper w10: CLK.PIN 151,-1250 262,-1361 469.79,-1361 494,-1336.79 U1.1@547.32,-1336.79
GDO0: GDO0.PIN U1.6 | length 841.7
  Top Copper w10: GDO0.PIN 141,-1400 177,-1436 544,-1436 556.63,-1448.63 693.42,-1448.63 714,-1428.06 714,-1388 662.48,-1336.48 U1.6@662.48,-1300.37
GDO2: GDO2.PIN U1.3 | length 597.7
  Top Copper w10: GDO2.PIN 146,-1350 206,-1410 544,-1410 587,-1367 U1.3
GND: C1.1 C2.1 C3.1 C23.1 C24.1 C25.1 C26.1 C27.1 C30.1 C41.1 C51.1 C81.1 C91.1 C101.1 C111.1 C112.1 C131.1 C141.1 C151.1 C161.1 C181.1 GND.PIN J1.2 J1.3 J1.4 J1.5 R141.1 R171.1 U1.16 U1.19 U1.21 U2.1 U2.3 U2.9 U2.12 U2.17 U3.2 U3.5 U3.6 U4.1 U4.3 U4.4 U4.6 Y1.2 Y1.4 | length 497
  Top Copper w10: U2.9 459.82,-607.54 v3(476.55,-590.8) U2.17 ; U2.3 485.41,-556.35 U2.17 ; U1.19@497.71,-1280.68 U1.19@498.02,-1280.68 ; U1.19 546.32,-1279.68 U1.21@557.16,-1290.53 ; U2.12 536.59,-607.54 U2.17 ; U2.1 536.59,-530.76 v3(519.86,-547.5) U2.17 ; C41.1 C51.1 677.68,-1428.32 692,-1414 v1(692,-1412)
  other v1: 921,-1332 374,-1272 801,-1262 358,-1222 802,-1219 371,-1155 655,-1051 310,-1038 149,-1001 469,-999 655,-999 359,-950 655,-916 468,-902 267,-858 487,-847 280,-775 320,-775 360,-775 400,-775 440,-775 480,-775 584,-775 620,-775 660,-775 700,-775 740,-775 780,-775 820,-775 860,-775 900,-775 940,-775 971,-775 266,-747 970,-740 266,-711 970,-700 586,-699 266,-673 970,-660 970,-620 719,-608 970,-580 266,-550 970,-540 266,-510 970,-500 74,-478 194,-478 732,-477 266,-470 970,-460 266,-430 970,-420 266,-390 362,-382 970,-380 32,-378 74,-378 112,-378 152,-378 192,-378 232,-378 731,-357 630,-356 680,-356 266,-350 970,-340 970,-300 640,-287 970,-260 266,-240 34,-228 74,-228 114,-228 154,-228 194,-228 234,-228 970,-220 266,-200 970,-180 460,-177 266,-160 970,-140 194,-131 74,-129 266,-120 970,-100 266,-80 290,-67 330,-67 370,-67 410,-67 450,-67 490,-67 530,-67 570,-67 610,-67 650,-67 690,-67 730,-67 770,-67 810,-67 850,-67 890,-67 930,-67 970,-67
  other v2: 557.47,-1289.53 616.53,-1289.53 587,-1260 557.47,-1230.47 616.53,-1230.47
HGM: HGM.PIN U2.6 | length 792.3
  Top Copper w10: v2(365,-575) 383.65,-556.35 U2.6
  Bottom Copper w10: HGM.PIN 61.08,-1050 85.37,-1025.71 85.37,-664.63 175,-575 v2(365,-575)
LNA_EN: LNA_EN.PIN U2.7 | length 799.3
  Top Copper w10: v2(365,-615) 398.06,-581.94 U2.7
  Bottom Copper w10: LNA_EN.PIN 55.71,-1100 98.87,-1056.83 98.87,-701.13 185,-615 v2(365,-615)
MISO: MISO.PIN U1.2 | length 583.8
  Top Copper w10: MISO.PIN 150,-1300 233,-1383 543.53,-1383 567.01,-1359.52 U1.2@567.01,-1336.79
MOSI: MOSI.PIN U1.20 | length 526.2
  Top Copper w10: MOSI.PIN 150,-1200 286,-1336 453.85,-1336 489.85,-1300 505,-1300
NetC21_1: C21.1 C23.2 L22.2 L23.2 | length 164
  Top Copper w15: L22.2 456.76,-342.53 C21.1 509.24,-289.41 510.65,-288 C23.2
NetC22_1: C22.1 C52.2 U2.4 | length 175.5
  Top Copper w15: C52.2 383.44,-495.56 422.24,-456.76 C22.1 459.82,-470.69 U2.4
NetC22_2: C22.2 L22.1 | length 55.8
  Top Copper w15: L22.1 422.24,-343.16 C22.2
NetC24_2: C24.2 L23.1 L24.2 | length 112.8
  Top Copper w15: L24.2 397.65,-252.68 L23.1 ; C24.2@458.32,-254 C24.2
NetC25_2: C25.2 J1.1 L24.1 | length 291.2
  Top Copper w15: J1.1 123.68,-304.68 C25.2 362.68,-304 L24.1
NetC51_2: C51.2 U1.5 | length 75.7
  Top Copper w10: U1.5 626.37,-1363.81 C51.2 C51.2@656.24,-1388.24
NetC52_1: C52.1 U2.5 | length 60.4
  Top Copper w15: C52.1 366.77,-530.76 U2.5
NetC81_2: C81.2 U1.8 Y1.1 | length 258.1
  Top Copper w10: 665.74,-1260 706.63,-1260 708.73,-1262.1 709.1,-1262.1 780.29,-1333.29 C81.2 810.27,-1333.29 Y1.1
NetC101_2: C101.2 U1.10 Y1.3 | length 327.8
  Top Copper w10: U1.10@662.48,-1221.63 662.48,-1208.52 722.29,-1148.71 C101.2 874.71,-1148.71 920.28,-1194.28 Y1.3
NetC112_2: C112.2 L111.1 U4.2 | length 105.7
  Top Copper w15: L111.1 560.27,-800.95 560.27,-844.95 C112.2 562.66,-847.34 562.66,-902.43 U4.2
NetL111_2: L111.2 U2.10 U2.11 | length 184.3
  Top Copper w15: U2.10 U2.11 ; 498.2,-650.84 498.2,-744.53 523.68,-770 L111.2
NetR141_2: R141.2 U2.14 | length 73.7
  Top Copper w15: U2.14 605.63,-581.94 R141.2
NetR151_2: R151.2 U2.15 | length 63.1
  Top Copper w15: U2.15 U2.15 R151.2
NetR161_2: R161.2 U2.16 | length 73.2
  Top Copper w15: U2.16 595.94,-504.88 R161.2
NetR171_2: R171.2 U1.17 | length 72.6
  Top Copper w10: R171.2 467,-1221 486.32,-1240.32 U1.17
NetU1_12: U1.12 U3.4 | length 67.7
  Top Copper w10: U1.12@606.38,-1185.21 U1.12@606.38,-1184.21 ; U1.12 606.68,-1129.26 U3.4
NetU1_13: U1.13 U3.3 | length 68.1
  Top Copper w10: U3.3 580,-1120.97 586.69,-1127.66 586.69,-1182.26
NetU3_1: U3.1 U4.5 | length 75.2
  Top Copper w10: U4.5 576,-1012.23 U3.1
PA_EN: PA_EN.PIN U2.8 | length 803.6
  Top Copper w10: v2(365,-650) 407.46,-607.54 U2.8
  Bottom Copper w10: PA_EN.PIN 55.71,-1150 112.37,-1093.33 112.37,-747.63 210,-650 v2(365,-650)
PA_OUT: C21.2 L21.1 U2.2 | length 120.9
  Top Copper w15: C21.2 509.24,-432.18 L21.1 511,-433.94 U2.2
VDD: C2.2 FB1.1 L1.1 VDD.PIN | length 327.7
  Top Copper w10: FB1.1@232.32,-950 L1.1 ; FB1.1@233,-950 C2.2
  Top Copper w20: VDD.PIN FB1.1@232.32,-950 ; FB1.1 FB1.1@232.32,-950 ; L1.1 FB1.1@232.32,-950 ; FB1.1@233,-950 FB1.1@232.32,-950
VDD_CC1101: C1.2 C41.2 C91.2 C111.2 C141.2 C151.2 C181.2 FB1.2 U1.4 U1.9 U1.11 U1.14 U1.15 U1.18 | length 780.2
  Top Copper w10: FB1.2 233,-986 C1.2 233,-1092 ; v1(447.32,-1107.68) C151.2 517.11,-1155 529.6,-1167.5 547.32,-1167.5 ; v1(449.32,-1309.68) C181.2 476.4,-1272 488.4,-1260 508.26,-1260 ; v1(492.68,-1127.32) C141.2 ; C141.2@541.69,-1129.32 567.32,-1154.95 U1.14 ; U1.14@567.01,-1184.64 U1.14@567.01,-1183.64 ; v1(570,-1421) 570,-1419 596.18,-1392.82 606.38,-1392.82 606.68,-1392.51 U1.4 ; U1.11@626.06,-1185.21 626.06,-1159.95 C111.2 v1(699.32,-1129.32) ; U1.9@663.05,-1241.32 U1.9@663.37,-1241 ; U1.9 723.38,-1240.32 C91.2 v1(724.06,-1195.94)
  other v1: 215,-1120 245,-1120 215,-1090 245,-1090
VDD_CC1190: C3.2 C26.2 C27.2 C30.2 C161.2 L1.2 L21.2 L131.1 R151.1 R161.1 | length 521.5
  Top Copper w10: 182,-822 C3.2 L1.2@233,-869
  Top Copper w15: L21.2 C26.2@680,-432.85 ; R161.1 677.84,-555.87 R151.1 678.46,-556.32 C161.2 v1(775,-556.32) ; C26.2 C30.2 v1(773.95,-433.05) ; L131.1 v1(756,-662)
  other v1: 156,-837 186,-837 156,-807 186,-807
VDD_LNA: C131.2 L131.2 U2.13 | length 128.6
  Top Copper w15: U2.13 573.18,-607.54 C131.2 628.76,-662 L131.2

## Polygon pours and split planes (outlines as drawn)
VDD_CC1190 on Signal Layer POWER "VDD_CC1190_L03_P014" (solid, pour order 14): 0,0 1000,0 1000,-875 0,-875
VDD_CC1101 on Signal Layer POWER "VDD_CC1101_L03_P012" (solid, pour order 12): 0,-899 1000,-899 1000,-1500 0,-1500
GND on Bottom Copper "GND_L04_P016" (solid, pour order 16): 0,0 1000,0 1000,-1500 0,-1500
GND on Signal Layer GND "GND_L02_P004" (solid, pour order 4): -0.04,0.04 999.96,0.04 999.96,-1499.96 -0.04,-1499.96
GND on Top Copper "GND_L01_P008" (solid, remove dead copper, pour order 8): -0.04,-0.24 999.96,-0.24 999.96,-1500.24 -0.04,-1500.24

## Keep-outs
Keep-Out Layer:
  the board outline again, w7.87

## Other copper
Top Copper:
  rectangle net VDD_CC1190: 136,-857 206,-788
  rectangle net VDD_CC1101: 195,-1140 265,-1071